# EAGLE board XBee Teensy Test (EAGLE 7.6.0)
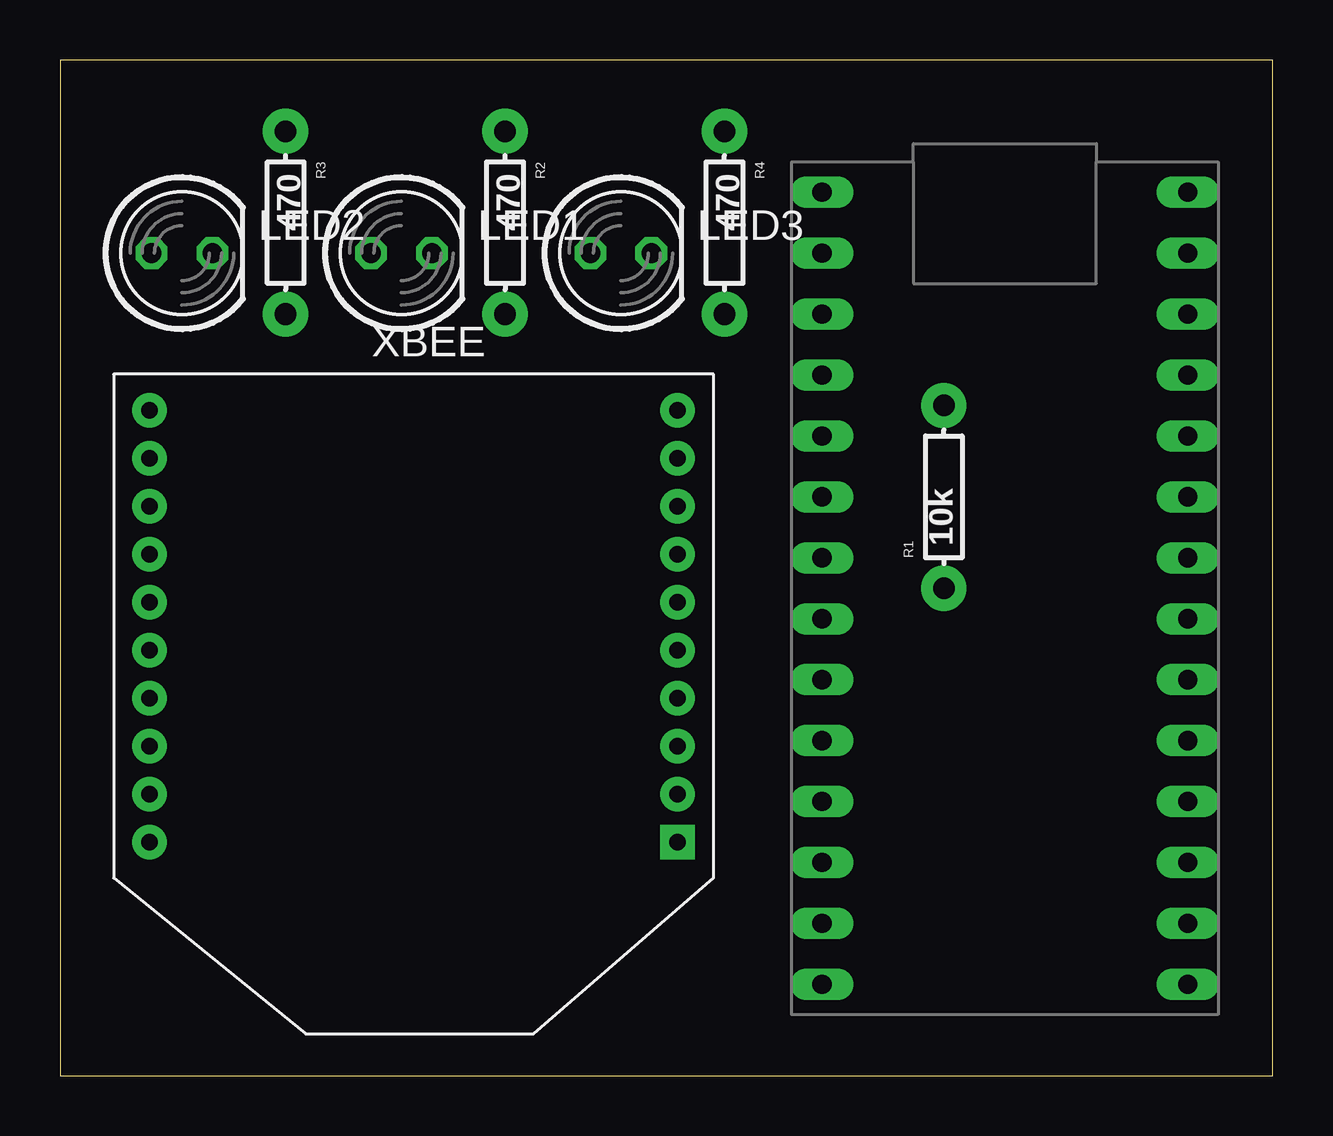
[diagram p0: board, top side]
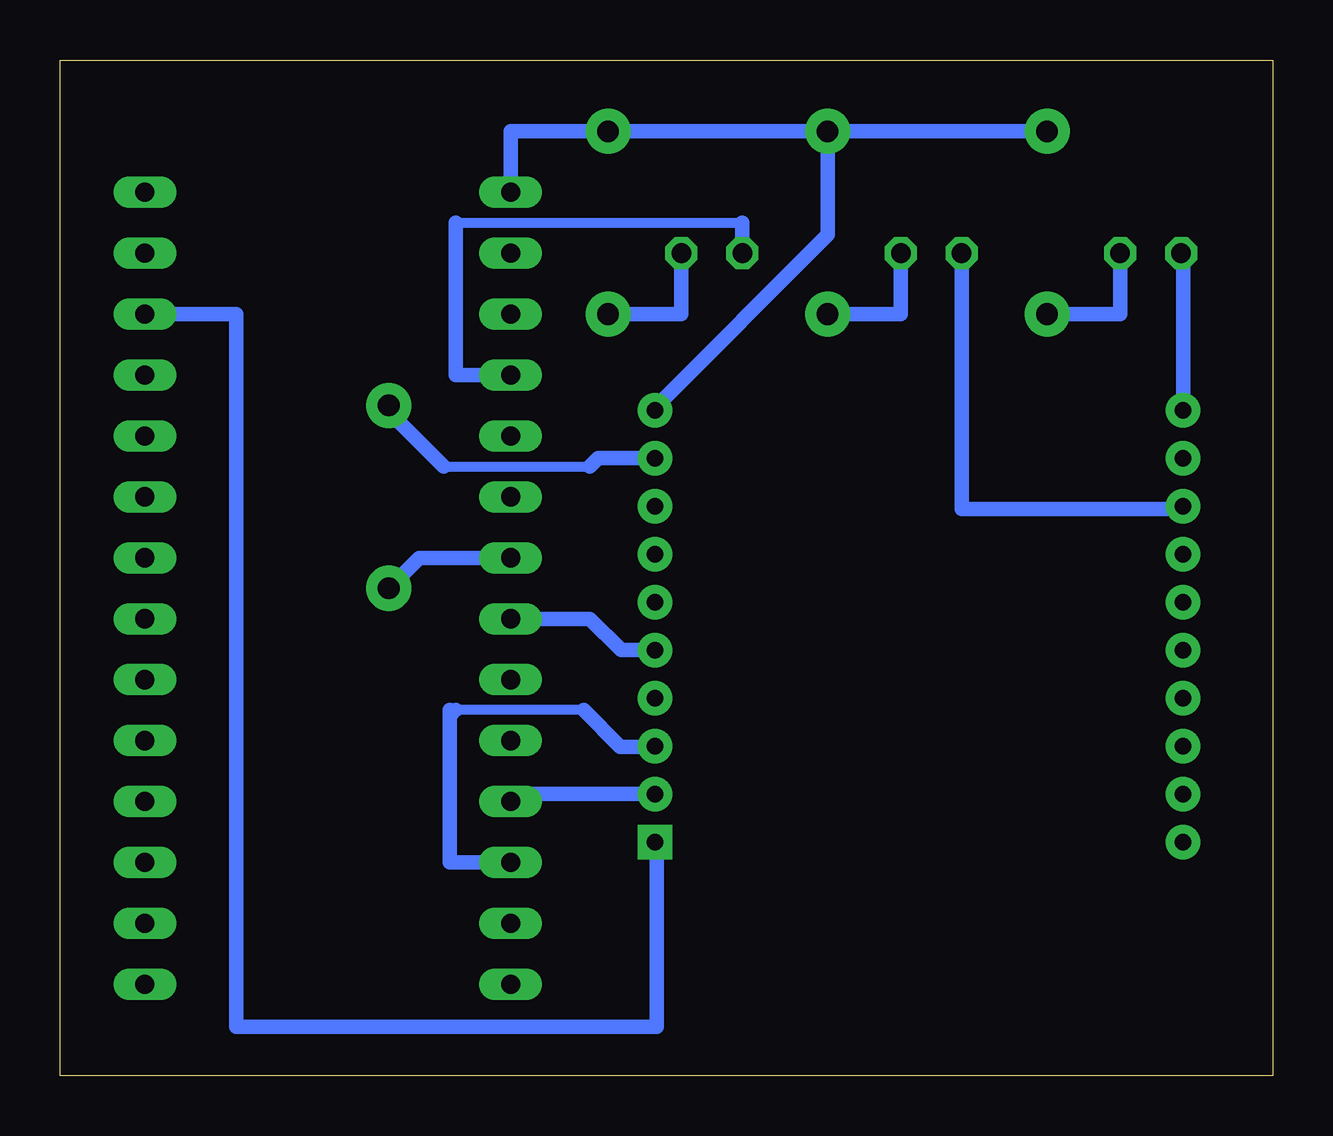
[diagram p1: board, bottom side, seen from below]

Size 50.53 x 42.34 mm. Coordinates in mm from the lower left corner, seen from the top.
Outline: 0,0 50.53,0 50.53,42.34 0,42.34 0,0
Copper layers (1*16): Top 0.035mm / dielectric 1.5mm / Bottom 0.035mm
Design rules "default": minimum track width 10mil, minimum drill 24mil, track to track 8mil, track to pad 8mil, pad to pad 8mil, via to via 8mil, smd to smd 8mil, copper to edge 40mil, drill to drill 8mil, minimum pad ring 10mil, minimum via ring 8mil, stop-mask expansion 4mil, vias tented up to drill 0mil, thermal gap 10mil

## Footprints (pad centres in the part's own frame; a part is rotated, then mirrored left to right if it is on the bottom)
LED-5MM = drill 0.813 octagon: A -1.27,0; K 1.27,0
AXIAL-0.3EZ = drill 0.9 pad 1.88: P$1 -3.81,0; P$2 3.81,0
TEENSY_3.2_SIMPLE = drill 0.8 long: 3.3V 16.51,29.21; A0 16.51,3.81; A1 16.51,6.35; A2 16.51,8.89; A3 16.51,11.43; A4 16.51,13.97; A5 16.51,16.51; A6 16.51,19.05; A7 16.51,21.59; A8 16.51,24.13; A9 16.51,26.67; AGND 16.51,31.75; D0(RX1) 1.27,31.75; D1(TX1) 1.27,29.21; D2 1.27,26.67; D3(CANTX) 1.27,24.13; D4(CANRX) 1.27,21.59; D5 1.27,19.05; D6 1.27,16.51; D7(RX3) 1.27,13.97; D8(TX3) 1.27,11.43; D9(RX2) 1.27,8.89; D10(TX2) 1.27,6.35; D11 1.27,3.81; D12 1.27,1.27; D13 16.51,1.27; GND 1.27,34.29; VIN 16.51,34.29
XBEE = drill 0.7 pad 1.422 square: 1 -11,5.5 | drill 0.7 pad 1.422: 2 -11,3.5; 3 -11,1.5; 4 -11,-0.5; 5 -11,-2.5; 6 -11,-4.5; 7 -11,-6.5; 8 -11,-8.5; 9 -11,-10.5; 10 -11,-12.5; 11 11,-12.5; 12 11,-10.5; 13 11,-8.5; 14 11,-6.5; 15 11,-4.5; 16 11,-2.5; 17 11,-0.5; 18 11,1.5; 19 11,3.5; 20 11,5.5

## Placement (x,y rotation side)
LED1  [LED-5MM]  14.22,34.29 0 top
LED2  [LED-5MM]  5.08,34.29 0 top
LED3  [LED-5MM]  23.37,34.29 0 top
R1  10k  [AXIAL-0.3EZ]  36.83,24.13 90 top
R2  470  [AXIAL-0.3EZ]  18.54,35.56 270 top
R3  470  [AXIAL-0.3EZ]  9.4,35.56 270 top
R4  470  [AXIAL-0.3EZ]  27.69,35.56 270 top
U$2  TEENSY_3.2_SIMPLE  [TEENSY_3.2_SIMPLE]  30.48,2.54 0 top
XBEE  XBEE  [XBEE]  14.73,15.24 180 top

## Library data of the parts
LED1-LED3 R1-R4 U$2 XBEE = HyTechDevices

## Nets
GND: R2.P$1 R3.P$1 R4.P$1 U$2.GND XBEE.10
N$1: R1.P$2 XBEE.9
N$2: U$2.D9(RX2) XBEE.2
N$3: U$2.D10(TX2) XBEE.3
N$4: U$2.D6 XBEE.5
N$5: R1.P$1 U$2.D5
N$6: LED2.A XBEE.11
N$7: LED1.A XBEE.13
N$8: LED1.K R2.P$2
N$9: LED2.K R3.P$2
N$10: LED3.K R4.P$2
N$11: LED3.A U$2.D2
VCC: U$2.3.3V XBEE.1

## Tracks (layer width: path | path; a pad name or v marks a point on that pad's centre or on a via)
GND
  Bottom 0.61: R3.P$1 R2.P$1 | R2.P$1 R4.P$1 31.75,39.37 U$2.GND | XBEE.10 25.73,27.86 18.54,35.05 R2.P$1
N$1
  Bottom 0.406: 34.54,25.4 28.45,25.4
  Bottom 0.61: R1.P$2 36.83,27.69 34.54,25.4 | XBEE.9 28.11,25.74 28.45,25.4
N$2
  Bottom 0.61: XBEE.2 31.75,11.74 U$2.D9(RX2)
N$3
  Bottom 0.406: 28.7,15.24 34.04,15.24
  Bottom 0.61: U$2.D10(TX2) 34.29,8.89 34.29,14.99 | 34.29,14.99 34.29,15.24 | XBEE.3 25.73,13.72 27.18,13.72 28.7,15.24 | 34.04,15.24 34.29,14.99
N$4
  Bottom 0.61: XBEE.5 27.14,17.74 28.45,19.05 U$2.D6
N$5
  Bottom 0.61: U$2.D5 35.56,21.59 R1.P$1
N$6
  Bottom 0.61: LED2.A 3.73,34.29 XBEE.11
N$7
  Bottom 0.61: LED1.A 12.95,23.62 3.73,23.62 XBEE.13
N$8
  Bottom 0.61: LED1.K 15.49,31.75 R2.P$2
N$9
  Bottom 0.61: LED2.K 6.35,31.75 R3.P$2
N$10
  Bottom 0.61: R4.P$2 24.64,31.75 LED3.K
N$11
  Bottom 0.406: 34.04,35.56 22.1,35.56
  Bottom 0.61: 22.1,35.56 LED3.A | 34.04,35.56 34.04,29.21 U$2.D2
VCC
  Bottom 0.61: XBEE.1 25.65,9.74 25.65,2.03 43.18,2.03 43.18,31.75 U$2.3.3V